# Altium PCB BMS Interface Board.PcbDoc
Units mm, origin at the board's own origin, x right, y up, seen from the top; angles counter-clockwise.
Board outline 76 x 88 mm, 2 copper layers (Top Layer, Bottom Layer); 45 components, 31 nets, 140 pads, 13 vias.
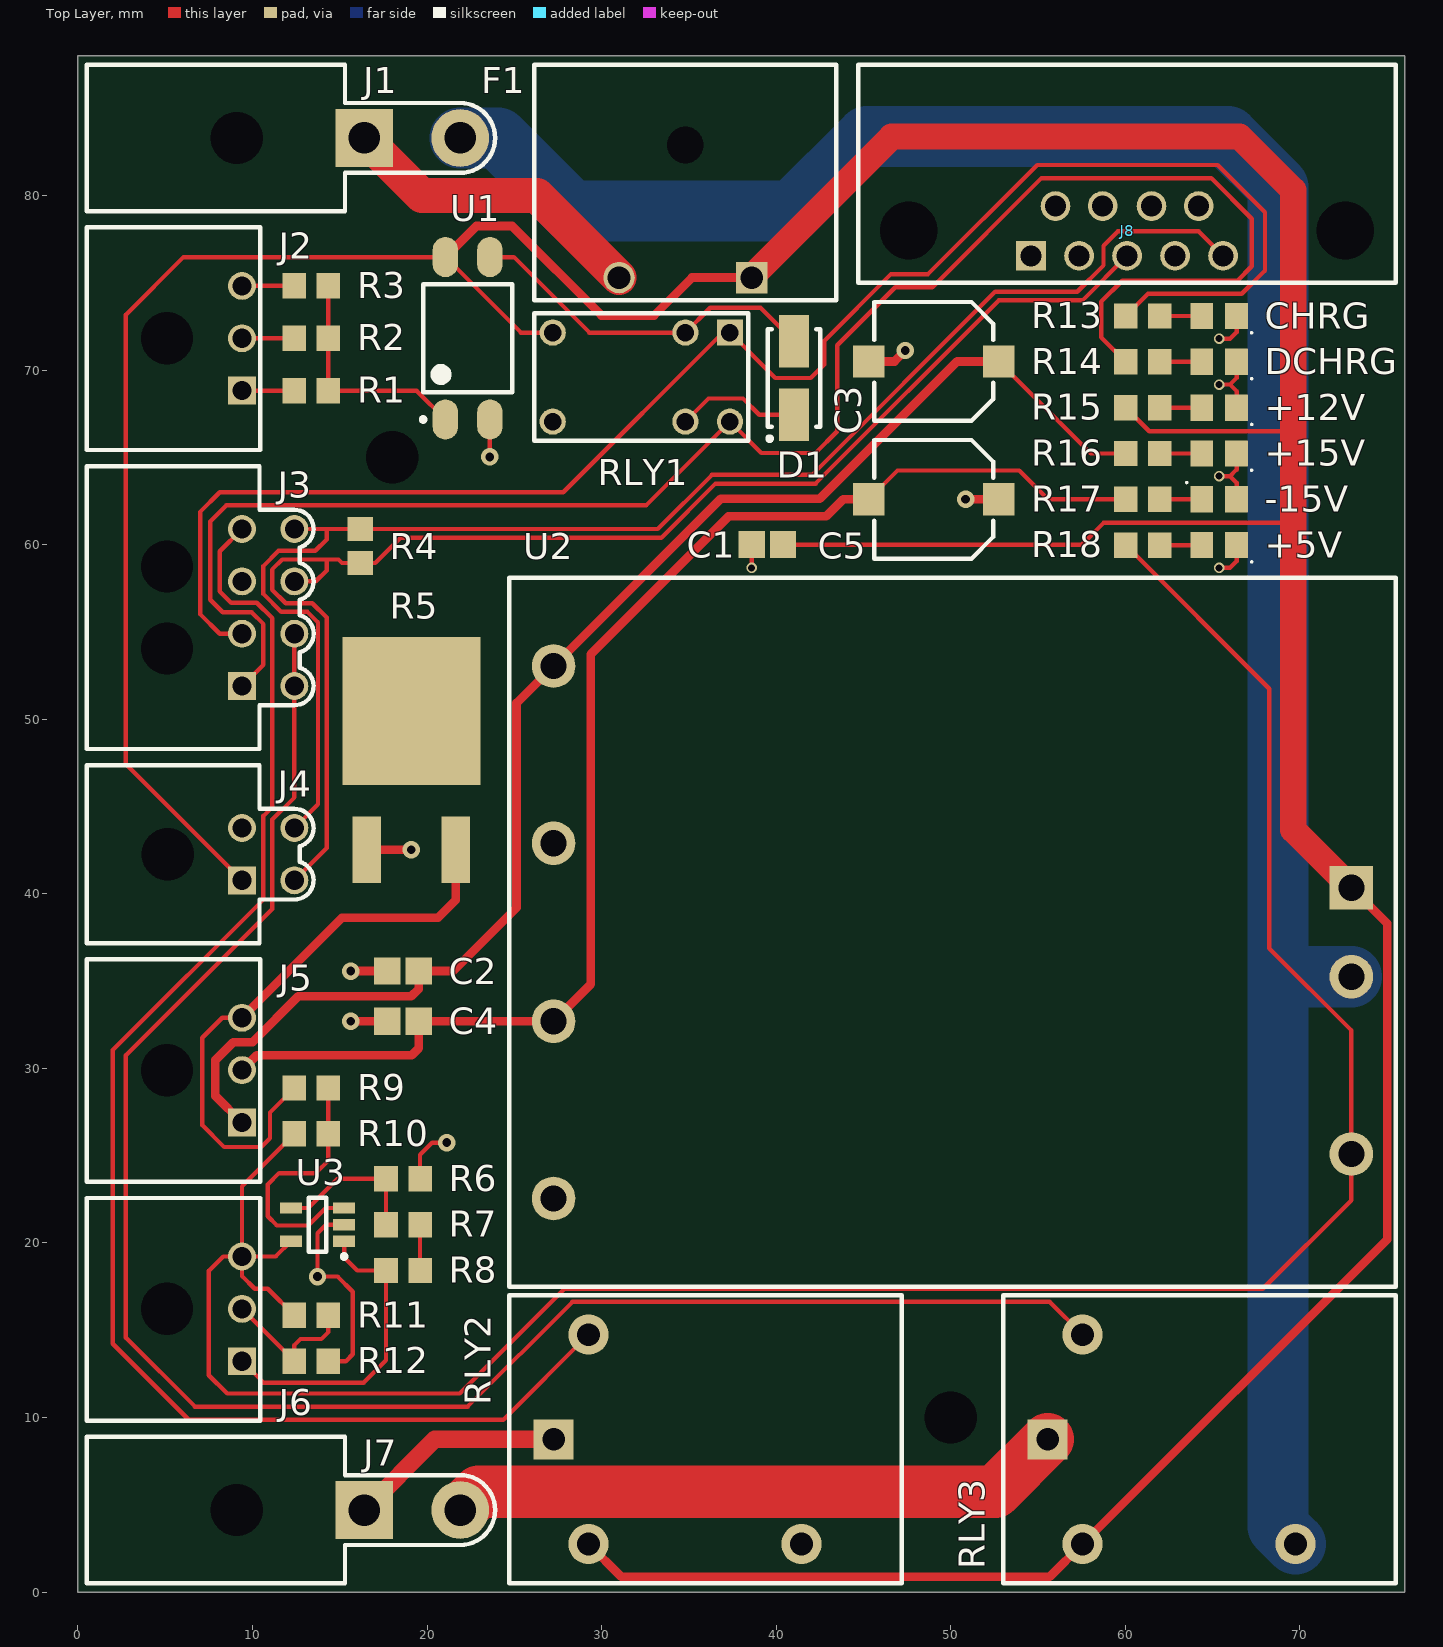
[diagram p0: Top Layer view]
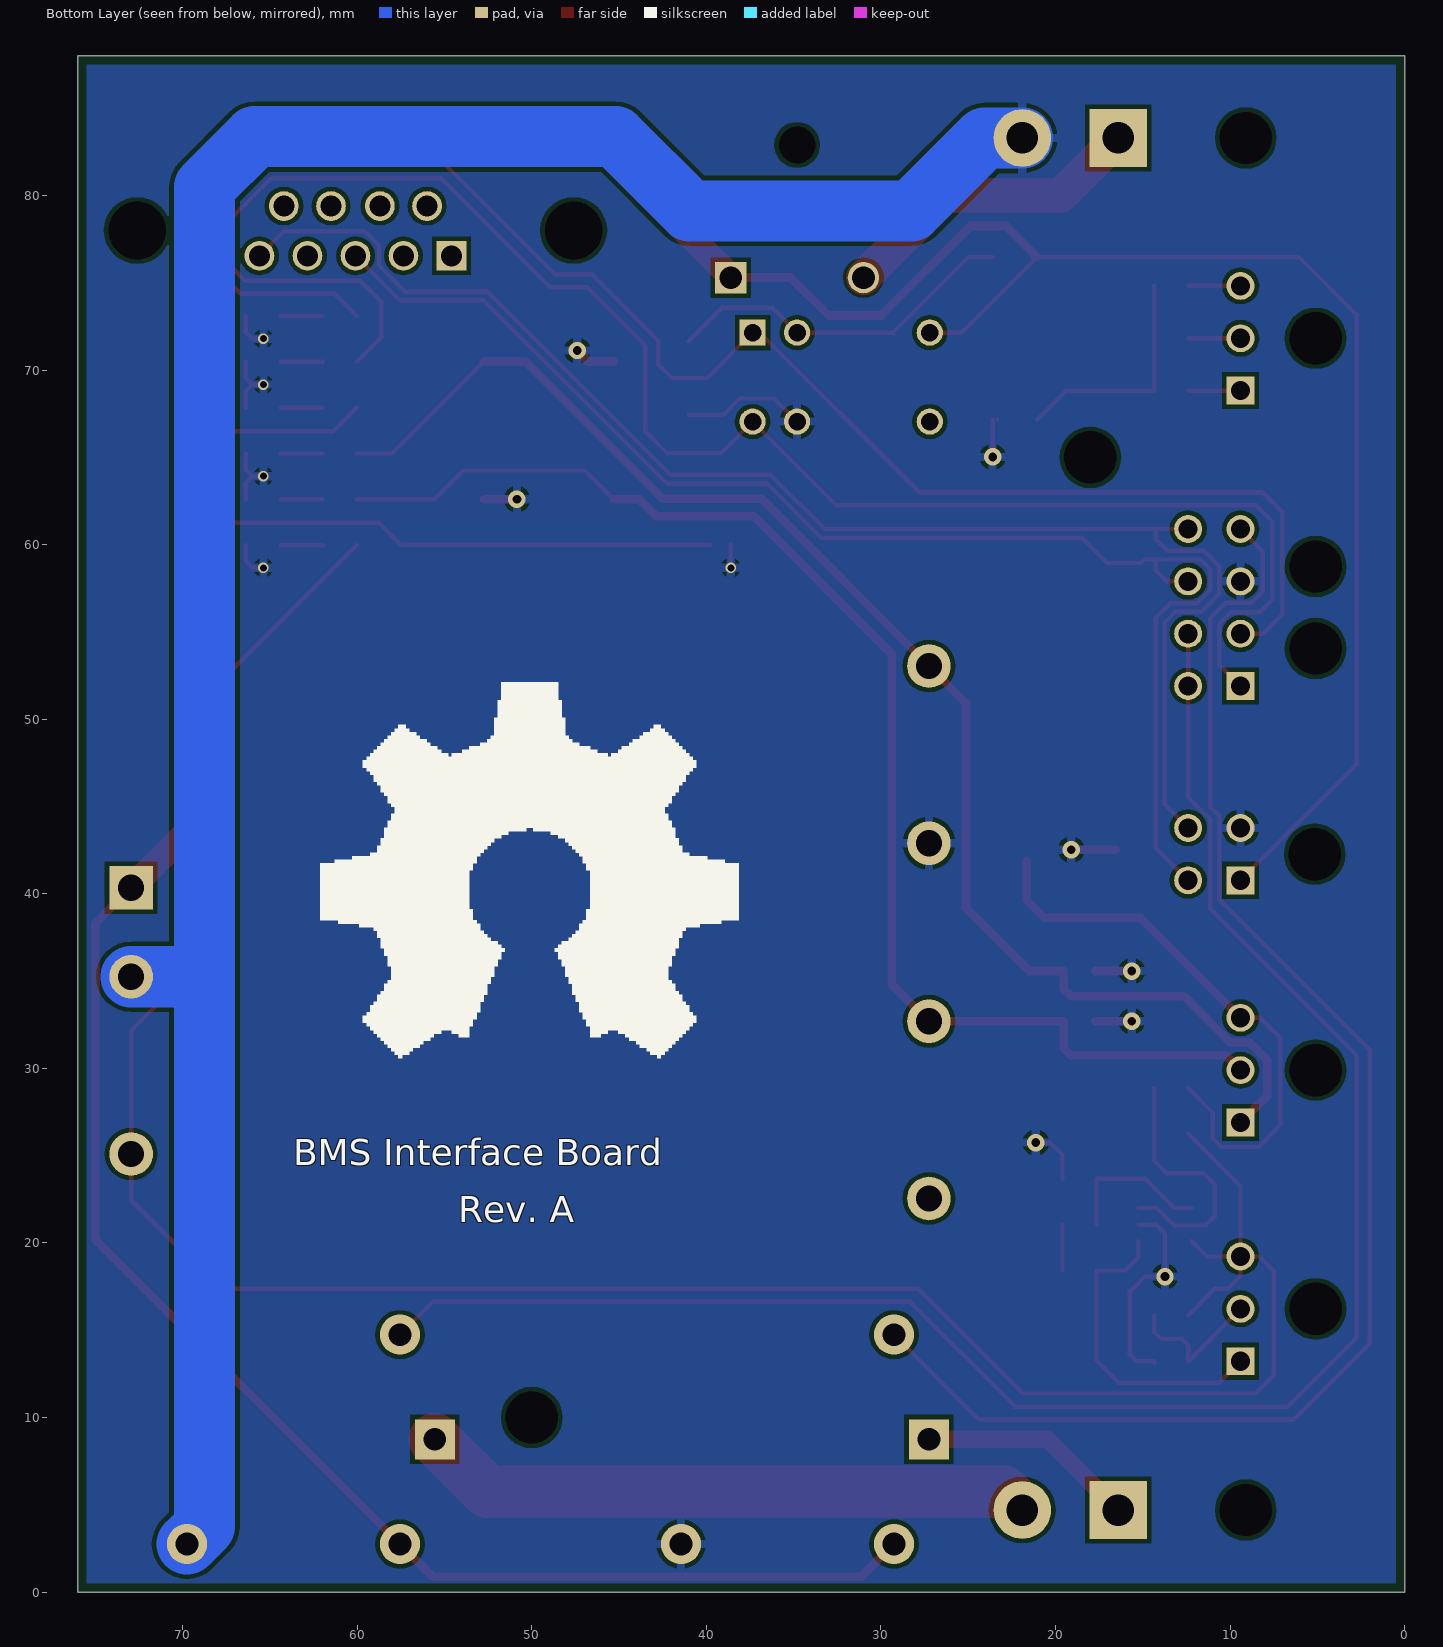
[diagram p1: Bottom Layer view, seen from below]

## Layer stack, top to bottom
Top Solder: solder mask 0.0102, Solder Resist, Dk 3.5
Top Layer: signal copper 0.0356
Dielectric1: dielectric 0.32, FR-4, Dk 4.8
Bottom Layer: signal copper 0.0356
Bottom Solder: solder mask 0.0102, Solder Resist, Dk 3.5

## Board outline
0,0 0,88 76,88 76,0

## Design rules (kind name [scope] priority, off if disabled: settings)
Clearance [All] p1: gap=0.25
ComponentClearance [All] p1: gap=0.25 collisioncheckmode=3 verticalgap=0.25 showdistances=FALSE
DiffPairsRouting [All] p1: maxlimit=0.254 minlimit=0.25 mostfreqgap=0.25 toplayer_minwidth=0.25 toplayer_maxwidth=0.4 toplayer_prefwidth=0.25 bottomlayer_minwidth=0.25 bottomlayer_maxwidth=0.4 bottomlayer_prefwidth=0.25 maxuncoupledlength=12.7
FabricationTestPointUsage TestPointUsage [All] p1: valid=0 allowmultiple=FALSE
FabricationTestpoint Testpoint [All] p1: side=3 testpointundercomponent=TRUE minsize=1.016 maxsize=2.54 preferedsize=1.524 minholesize=0 maxholesize=1.016 preferedholesize=0.813 testpointgrid=0.025 allowsidetop=TRUE allowsidebottom=TRUE usegrid=TRUE gridtolerance=0
HoleSize [All] p1: absolutevalues=TRUE maxlimit=5 minlimit=0.025 maxpercent=80.000 minpercent=20.000
PlaneClearance [All] p1: clearance=0.5
PlaneConnect [All] p1: planeconnectstyle=Relief reliefexpansion=0.5 reliefentries=4 reliefconductorwidth=0.25 reliefairgap=0.25
PolygonConnect [All] p1: connectstyle=Relief reliefconductorwidth=0.5 reliefentries=4 polygonreliefangle="90 Angle" airgapwidth=0.25
RoutingVias [All] p1: holewidth=1 width=1.5 viastyle="Through Hole" minholewidth=0.8 minwidth=1.3 maxholewidth=1.5 maxwidth=2
SilkToSolderMaskClearance SilkscreenOverComponentPads [IsPad] p1: minsilkscreentomaskgap=0.254 clearancetoexposedcopper=TRUE
SolderMaskExpansion [All] p1: expansion=0.102
UnpouredPolygon [All] p1: allowunpoured=FALSE
Width [All] p1: maxlimit=10 minlimit=0.2 preferedwidth=0.5
21 further rules are at their usual default settings.

## Classes and differential pairs
differential pair CAN1: +CAN1_P -CAN1_N

## Components (designator, comment, footprint, x,y, rotation, side; value= is the part's Value field where it differs from the comment)
+5V "LTST-C170GKT" "LITE-ON LTST-C170GKT (2012)" 65.375,59.975 r0 top (schematic designator D7)
+12V "LTST-C170GKT" "LITE-ON LTST-C170GKT (2012)" 65.375,67.85 r0 top (schematic designator D4)
+15V "LTST-C170GKT" "LITE-ON LTST-C170GKT (2012)" 65.375,65.225 r0 top (schematic designator D5)
-15V "LTST-C170GKT" "LITE-ON LTST-C170GKT (2012)" 65.375,62.6 r180 top (schematic designator D6)
C1 "Cap" "KEMET CERAMIC CAPACITOR (2012)" 39.5,60 r0 top
C2 "Cap" "KEMET CERAMIC CAPACITOR (2012)" 18.625,35.575 r0 top
C3 "Cap" "PANASONIC EEE-1EA101XAP" 49.025,70.5 r180 top locked
C4 "Cap" "KEMET CERAMIC CAPACITOR (2012)" 18.625,32.7 r0 top
C5 "Cap" "PANASONIC EEE-1EA101XAP" 49.025,62.6 r180 top locked (schematic designator C3)
CHRG "LTST-C170GKT" "LITE-ON LTST-C170GKT (2012)" 65.375,73.1 r0 top (schematic designator D2)
D1 "S1G" "FAIRCHILD S1G (DO-214AC)" 41.025,69.55 r90 top locked
DCHRG "LTST-C170GKT" "LITE-ON LTST-C170GKT (2012)" 65.375,70.475 r0 top (schematic designator D3)
F1 "4A" "LITTELFUSE 01530007Z" 34.8,79.1 r180 top locked
J1 "Molex Mega-Fit 172064-0002" "MOLEX MEGA-FIT 172064-0002" 9.1,83.3 r270 top locked
J2 "Molex Micro-Fit 43650-0300" "MOLEX MICRO-FIT 43650-0300" 7.25,71.825 r270 top locked
J3 "Molex Micro-Fit 43045-0800" "MOLEX MICRO-FIT 43045-0800" 5.1,56.4 r270 top locked
J4 "Molex Micro-Fit 43045-0400" "MOLEX MICRO-FIT 43045-0400" 5.1,42.275 r270 top locked
J5 "Molex Micro-Fit 43650-0300" "MOLEX MICRO-FIT 43650-0300" 7.25,29.9 r270 top locked
J6 "Molex Micro-Fit 43650-0300" "MOLEX MICRO-FIT 43650-0300" 7.25,16.225 r270 top locked
J7 "Molex Mega-Fit 172064-0002" "MOLEX MEGA-FIT 172064-0002" 9.1,4.7 r270 top locked
J8 "CAN1 DB9" "TE CONNECTIVITY 1734354-1" 60.1,78 r180 top locked
R1 "" "PHILIPS ERJ-SERIES RESISTOR (2012)" 13.375,68.825 r0 top
R2 "" "PHILIPS ERJ-SERIES RESISTOR (2012)" 13.375,71.825 r0 top
R3 "" "PHILIPS ERJ-SERIES RESISTOR (2012)" 13.375,74.825 r0 top
R4 "" "PHILIPS ERJ-SERIES RESISTOR (2012)" 16.175,59.925 r270 top
R5 "" "BOURNS PWR163S-25-2R50F (TO-252-3)" 19.1,44.425 r0 top
R6 "" "PHILIPS ERJ-SERIES RESISTOR (2012)" 18.625,23.675 r0 top locked
R7 "" "PHILIPS ERJ-SERIES RESISTOR (2012)" 18.625,21.05 r180 top locked
R8 "" "PHILIPS ERJ-SERIES RESISTOR (2012)" 18.625,18.425 r0 top locked
R9 "" "PHILIPS ERJ-SERIES RESISTOR (2012)" 13.375,28.875 r180 top locked
R10 "" "PHILIPS ERJ-SERIES RESISTOR (2012)" 13.375,26.25 r180 top locked
R11 "" "PHILIPS ERJ-SERIES RESISTOR (2012)" 13.375,15.85 r180 top locked
R12 "" "PHILIPS ERJ-SERIES RESISTOR (2012)" 13.375,13.225 r180 top locked
R13 "" "PHILIPS ERJ-SERIES RESISTOR (2012)" 61,73.1 r0 top
R14 "" "PHILIPS ERJ-SERIES RESISTOR (2012)" 61,70.475 r0 top
R15 "" "PHILIPS ERJ-SERIES RESISTOR (2012)" 61,67.85 r0 top
R16 "" "PHILIPS ERJ-SERIES RESISTOR (2012)" 61,65.225 r0 top
R17 "" "PHILIPS ERJ-SERIES RESISTOR (2012)" 61,62.6 r0 top
R18 "" "PHILIPS ERJ-SERIES RESISTOR (2012)" 61,59.975 r0 top
RLY1 "G5V-1 DC12" "OMRON G5V-1 DC12" 32.275,69.6 r180 top locked
RLY2 "G5LE-1A4 DC12" "OMRON G5LE-1A4 DC12" 35.95,8.75 r0 top
RLY3 "G5LE-1A4 DC12" "OMRON G5LE-1A4 DC12" 64.25,8.75 r0 top locked
U1 "LTV-817S" "LITE-ON LTV-817S (4-SOP)" 22.325,71.825 r90 top locked
U2 "PYB30-Q24-D15" "CUI PYB30-SERIES" 50.1,37.8 r180 top locked
U3 "MCP6071T-E/OT" "MICROCHIP MCP6071T-E/OT (SOT-23-5)" 13.725,21.05 r180 top locked

## Footprints (in the part's own frame and the unit in brackets; to place one, negate y for a bottom-side part, rotate by r counter-clockwise, add the part's x,y. Pads: shape width x height; smd on the part's side, far side on the other; paste and mask are expansions set on the pad)
"BOURNS PWR163S-25-2R50F (TO-252-3)" [mm] "25W 1% Thick Film Power Resistor"
  rect 1.65x3.8 smd: 1(-2.55,-1.9) 2(2.55,-1.9)
  rect 7.9x8.5 smd: ""(0,6.05)
"CUI PYB30-SERIES" [mm] "+/-15V 1A DC-DC Converter"
  rect 2.5x2.5 hole 1.5: 1(-22.85,-2.55)
  round 2.5 hole 1.5: 2(-22.85,2.55) 3(-22.85,12.7) 4(22.85,15.25) 5(22.85,5.1) 6(22.85,-5.1) 7(22.85,-15.25)
  silkscreen extent -25.4,-20.3 25.4,20.3, body extent -25.4,-20.3 25.4,20.3, height 11.8
"FAIRCHILD S1G (DO-214AC)" [mm] "400V 1A Rectifying Diode"
  rect 3x1.7 smd: 1(-2.1,0) 2(2.1,0)
  silkscreen extent -3.6,-1.5 2.8,1.52, body extent -2.8,-1.47 2.8,1.48, height 2.2
"KEMET CERAMIC CAPACITOR (2012)" [mm] "Ceramic Capacitor"
  rect 1.5x1.55 smd: 1(-0.9,0) 2(0.9,0)
  body extent -1.1,-0.72 1.1,0.72, height 1.4
"LITE-ON LTST-C170GKT (2012)" [mm] "Ultra-Bright Green LED"
  rect 1.3x1.5 smd: 1(-1,0) 2(1,0)
  silkscreen extent 1.81,-1.01 1.91,-0.91, body extent -1.05,-0.67 1.05,0.67, height 1.1
"LITE-ON LTV-817S (4-SOP)" [mm] "Photocoupler"
  oval 2.3x1.45 smd: 1(-4.65,1.275) 2(-4.65,-1.275) 3(4.65,-1.275) 4(4.65,1.275)
  silkscreen extent -4.77,-2.55 3.1,2.67, body extent -3.5,-2.55 3.5,2.55, height 4.6
"LITTELFUSE 01530007Z" [mm] "MINI Automotive PCB Fuseholder"
  rect 1.8x1.8 hole 1.3: 1(-3.8,3.8)
  round 1.8 hole 1.3: 2(3.8,3.8)
  round 0 hole 2.1: ""(0,-3.8)
  silkscreen extent -8.65,-8.4 8.65,5.1, body extent -8.6,-8.4 8.6,5.1, height 7.65
"MICROCHIP MCP6071T-E/OT (SOT-23-5)" [mm] "Low Offset Op-Amp"
  rect 1.25x0.65 smd: 1(-1.525,0.95) 2(-1.525,0) 3(-1.525,-0.95) 4(1.525,-0.95) 5(1.525,0.95)
  silkscreen extent -1.65,-1.55 0.5,1.95, body extent -0.9,-1.55 0.9,1.55, height 1.45
"MOLEX MEGA-FIT 172064-0002" [mm] "2-Pin Right-Angle Locking Male Header"
  rect 3.3x3.3 hole 1.8: 1(0,7.3)
  round 3.3 hole 1.8: 2(0,12.8)
  round 0 hole 3: ""(0,0)
  silkscreen extent -4.2,-8.6 4.2,14.8, body extent -4.2,-8.58 4.15,13.38, height 14.55
"MOLEX MICRO-FIT 43045-0400" [mm] "4-Pin Right-Angle Locking Male Header"
  rect 1.6x1.6 hole 1.1: 1(1.5,4.3)
  round 1.6 hole 1.1: 2(-1.5,4.3) 3(1.5,7.3) 4(-1.5,7.3)
  round 0 hole 3: ""(0,0.05)
  silkscreen extent -5.1,-4.6 5.1,8.4, body extent -5.07,-4.65 5.08,7.59, height 8.73
"MOLEX MICRO-FIT 43045-0800" [mm] "8-Pin Right-Angle Locking Male Header"
  rect 1.6x1.6 hole 1.1: 1(4.5,4.3)
  round 1.6 hole 1.1: 2(1.5,4.3) 3(-1.5,4.3) 4(-4.5,4.3) 5(4.5,7.3) 6(1.5,7.3) 7(-1.5,7.3) 8(-4.5,7.3)
  round 0 hole 3: ""(-2.35,0) ""(2.35,0)
  silkscreen extent -8.1,-4.6 8.1,8.41, body extent -8.08,-4.64 8.08,7.6, height 8.73
"MOLEX MICRO-FIT 43650-0300" [mm] "3-Pin Right-Angle Locking Male Header"
  rect 1.6x1.6 hole 1.1: 1(3,2.15)
  round 1.6 hole 1.1: 2(0,2.15) 3(-3,2.15)
  round 0 hole 3: ""(0,-2.15)
  silkscreen extent -6.35,-6.75 6.4,3.2, body extent -6.32,-6.75 6.33,3.15, height 5.54
"OMRON G5LE-1A4 DC12" [mm] "12VDC 10A SPST-NO Relay"
  rect 2.3x2.3 hole 1.3: 1(-8.7,0)
  round 2.3 hole 1.3: 2(-6.7,-6) 3(5.5,-6) 4(-6.7,6)
  silkscreen extent -11.25,-8.25 11.25,8.25, body extent -11.2,-8.2 11.2,8.2, height 19
"OMRON G5V-1 DC12" [mm] "12VDC 1A SPDT Relay"
  rect 1.5x1.5 hole 1: 1(-5.075,-2.55)
  round 1.5 hole 1: 2(-2.525,-2.55) 3(5.075,-2.55) 4(5.075,2.55) 5(-2.525,2.55) 6(-5.075,2.55)
  silkscreen extent -6.12,-3.65 6.12,3.65, body extent -6.1,-3.6 6.1,3.6, height 10
"PANASONIC EEE-1EA101XAP" [mm] "100uF 25V Aluminium Electrolytic Capacitor"
  rect 1.8x1.85 smd: 1(-3.725,0) 2(3.725,0)
  silkscreen extent -3.4,-3.4 3.4,3.4, body extent -3.4,-3.4 3.4,3.4, height 8
"PHILIPS ERJ-SERIES RESISTOR (2012)" [mm] "Thick Film Resistor"
  rect 1.35x1.45 smd: 1(-0.975,0) 2(0.975,0)
  body extent -1.1,-0.67 1.1,0.67, height 0.7
"TE CONNECTIVITY 1734354-1" [mm] "Female Right-Angle DB9 Connector"
  rect 1.7x1.7 hole 1.2: 1(5.5,1.45)
  round 1.7 hole 1.2: 2(2.75,1.45) 3(0,1.45) 4(-2.75,1.45) 5(-5.5,1.45) 6(4.1,-1.4) 7(1.4,-1.4) 8(-1.4,-1.4) 9(-4.1,-1.4)
  round 0 hole 3.3: ""(-12.5,0) ""(12.5,0)
  silkscreen extent -15.4,-9.5 15.4,3, body extent -15.4,-15.52 15.4,2.9, height 12.45

## Part data
+5V +12V +15V -15V CHRG DCHRG: library part LED0, "Typical INFRARED GaAs LED"
C1 C2 C4: "Capacitor"
C3 C5: library part "Cap Pol1", "Polarized Capacitor (Radial)"
D1: library part "Diode 1N4007", "1 Amp General Purpose Rectifier"
F1: library part "Fuse 1", "Fuse"
J1 J7: "2-Pin Right-Angle Locking Male Header"
J2 J5 J6: "3-Pin Right-Angle Locking Male Header"
J3: "8-Pin Right-Angle Locking Male Header"
J4: "4-Pin Right-Angle Locking Male Header"
J8: library part "D Connector 9", "Receptacle Assembly, 9 Position, Right Angle"
R1 R2 R3 R4 R5 R6 R7 R8 R9 R10 R11 R12 R13 R14 R15 R16 R17 R18: library part Res2, "Resistor"
RLY1: library part "Omron G5V-1 DC12", "12VDC 1A SPDT Relay"
RLY2 RLY3: library part "Omron G5LE-1A4 DC12", "12VDC 10A SPST-NO Relay"
U1: library part Optoisolator1, "4-Pin Phototransistor Optocoupler"
U2: library part "CUI PYB30-Q24-D15", "+/-15V 1A DC-DC Converter"
U3: library part "Microchip MCP6071T-E/OT", "Low Offset Op-Amp"

## Free pads (board coordinates)
  round 0 hole 3: ""(18,65) ""(50,10)

## Via types
v1: diameter 1, hole 0.5, Top Layer to Bottom Layer, 8 vias
v2: diameter 0.6, hole 0.4, Top Layer to Bottom Layer, 5 vias

## Nets (pads, with @x,y where several pads share a name; then routed paths per layer and width w, separated by ;. In a path a pad name is that pad's centre, name@x,y a point inside that pad or via, vN(x,y) a via of type N, cw(c..) or ccw(c..) an arc to the next point about the centre after c; other vN are vias at no path point)
+5V: J6.3 R10.2 R11.2 R18.1 U2.3 U3.5 | length 138.1
  Top Layer w0.25: U3.5 11.325,19.225 J6.3 ; R11.2 10.875,17.375 10.125,17.375 9.4,18.1 J6.3 ; R10.2 9.4,23.25 J6.3 ; R18.1 68.25,51.75 68.25,36.875 72.95,32.175 U2.3 72.95,22.45 67.875,17.375 27.875,17.375 21.875,11.375 8.55,11.375 7.5,12.425 7.5,18.4 8.325,19.225 J6.3
+12V: C1.2 F1.1 J4.1 R15.1 RLY1.3 RLY2.2 RLY3.2 U1.4 U2.1 | length 277.1
  Top Layer w0.25: J4.1 2.75,47.425 2.75,73.175 6.05,76.475 U1.4 25.375,72.15 RLY1.3 ; U1.4@21.175,76.475 U1.4@21.3,76.475 ; C1.2@39.775,60 57.5,60 58.75,61.25 69.625,61.25 ; R15.1 61.375,66.5 69.625,66.5
  Top Layer w0.5: U1.4 22.825,78.25 24.875,78.25 30,73.125 33,73.125 35.175,75.3 38.55,75.3 F1.1@38.575,75.325 ; RLY2.2 31.125,0.875 55.675,0.875 RLY3.2 75,20.2 75,38.3 U2.1
  Top Layer w1.5: F1.1@38.575,75.325 46.625,83.375 66.425,83.375 ; 66.55,83.375 69.625,80.3 69.625,66.5 69.625,43.675 U2.1
+15V: C2.2 C3.1 J5.1 R16.1 U2.7 | length 82.6
  Top Layer w0.25: C3.1 58.025,65.225 R16.1
  Top Layer w0.5: J5.1 7.875,28.425 7.875,30.475 8.9,31.5 10,31.5 12.625,34.125 19.1,34.125 19.525,34.55 C2.2 21.5,35.575 25.125,39.2 25.125,50.925 U2.7 36.825,62.625 42.5,62.625 50.375,70.5 C3.1
-15V: C4.2 C5.2 J5.2 R17.1 U2.5 | length 77.5
  Top Layer w0.25: C5.2 46.95,64.25 53.925,64.25 55.575,62.6 R17.1
  Top Layer w0.5: J5.2 10.25,30.75 19.125,30.75 19.525,31.15 C4.2 U2.5 29.375,34.825 29.375,53.725 37.275,61.625 42.875,61.625 43.85,62.6 C5.2
CAN1_N: J3.8 J4.4 J8.5 R4.1 | length 84.1
  Top Layer w0.25: J4.4 13.75,45.125 13.75,55.55 13.15,56.15 11.65,56.15 10.625,57.175 10.625,58.782 11.493,59.65 13.6,59.65 14.25,60.3 14.25,60.9 ; J3.8 14.25,60.9 ; J8.5 64.2,77.95 59.575,77.95 58.75,77.125 58.75,76 57.243,74.493 52.543,74.493 42.05,64 36.318,64 33.218,60.9 R4.1 14.25,60.9
CAN1_P: J3.7 J4.3 J8.3 R4.2 | length 80.1
  Top Layer w0.25: J4.3 14.25,42.625 14.25,55.828 13.428,56.65 11.9,56.65 11.125,57.425 11.125,58.575 11.7,59.15 14.25,59.15 ; J3.7 13.625,57.9 14.25,58.525 14.25,59.15 ; J8.3 57.543,73.993 52.75,73.993 42.257,63.5 36.525,63.5 33.425,60.4 18.482,60.4 17.032,58.95 R4.2 15.125,58.95 14.925,59.15 14.25,59.15
"CRNT. SENSOR CH1": J6.1 R8.1 U3.1 | length 18.1
  Top Layer w0.25: J6.1 10.625,12 16.375,12 17.65,13.275 R8.1 16,18.425 15.25,19.175 U3.1
"CRNT. SENSOR CH2": J6.2 R11.1 R12.2 | length 8.4
  Top Layer w0.25: J6.2 R12.2 12.4,14.15 12.75,14.5 13.95,14.5 14.35,14.9 R11.1
"CRNT. SENSOR IN": J5.3 R5.2 R9.2 | length 33.1
  Top Layer w0.25: J5.3 8.275,32.9 7.125,31.75 7.125,26.75 8.375,25.5 10.5,25.5 11,26 11,27.475 R9.2
  Top Layer w0.5: J5.3 15.125,38.625 20.625,38.625 21.65,39.65 R5.2@21.65,41.9
GND: +5V.2 +12V.2 +15V.2 -15V.1 C1.1 C2.1 C3.2 C4.1 C5.1 CHRG.2 D1.1 DCHRG.2 J1.2 J3.3 J4.2 R5.1 R6.2 R12.1 RLY1.5 RLY2.3 RLY3.3 U1.2 U2.2 U2.6 U3.2 | length 181.8
  Top Layer w0.25: R12.1@14.35,13.121 R12.1 15.35,13.225 15.75,13.625 15.75,17.2 14.875,18.075 v1(13.725,18.075) 13.725,20.55 14.225,21.05 U3.2 ; R6.2 19.6,25.05 20.3,25.75 v1(21.125,25.75) ; v1(23.6,65.025) U1.2 ; RLY1.5 36.125,68.375 38.1,68.375 39.025,67.45 D1.1 ; v2(38.6,58.675) C1.1 ; v2(65.375,58.675) 66,58.675 66.375,59.05 +5V.2 ; v2(65.375,63.925) 66,63.925 ; v2(65.375,69.175) 66,69.175 ; v2(65.375,71.8) 66,71.8 66.375,72.175 CHRG.2 ; -15V.1 66.375,63.55 66,63.925 ; +15V.2 66.375,64.3 66,63.925 ; +12V.2 66.375,68.8 66,69.175 ; DCHRG.2 66.375,69.55 66,69.175
  Top Layer w0.5: v1(15.625,32.7) C4.1 ; v1(15.625,35.575) C2.1 ; R5.1 v1(19.1,42.525) ; C3.2 46.775,70.5 v1(47.4,71.125) ; v1(50.85,62.6) C5.1
  Bottom Layer w3.5: J1.2 24.075,83.3 28.25,79.125 40.95,79.125 45.2,83.375 65.875,83.375 68.75,80.5 68.75,35.25 ; RLY3.3 68.75,3.75 68.75,35.25 ; U2.2 68.75,35.25
Net+5V_1: +5V.1 R18.2 | length 2.4
  Top Layer w0.25: R18.2 +5V.1
Net+12V_1: +12V.1 R15.2 | length 2.4
  Top Layer w0.25: R15.2 +12V.1
Net+15V_1: +15V.1 R16.2 | length 2.4
  Top Layer w0.25: R16.2 +15V.1
Net-15V_2: -15V.2 R17.2 | length 2.4
  Top Layer w0.25: R17.2 -15V.2
NetCHRG_1: CHRG.1 R13.2 | length 2.4
  Top Layer w0.25: R13.2 CHRG.1
NetD1_2: D1.2 RLY1.2 U1.3 | length 20.6
  Top Layer w0.25: U1.3 24.975,76.475 29.3,72.15 RLY1.2 36.225,73.575 39.1,73.575 D1.2
NetDCHRG_1: DCHRG.1 R14.2 | length 2.4
  Top Layer w0.25: R14.2 DCHRG.1
NetF1_2: F1.2 J1.1 | length 17.9
  Top Layer w2: J1.1 19.7,80 26.3,80 F1.2
NetJ2_1: J2.1 R1.1 | length 3
  Top Layer w0.25: J2.1 R1.1
NetJ2_2: J2.2 R2.1 | length 3
  Top Layer w0.25: J2.2 R2.1
NetJ2_3: J2.3 R3.1 | length 3
  Top Layer w0.25: J2.3 R3.1
NetJ3_1: J3.1 R14.1 RLY1.6 | length 101.5
  Top Layer w0.25: J3.1 10.625,53.125 10.625,55.45 9.95,56.125 8.3,56.125 7.575,56.85 7.575,61.325 8.5,62.25 32.55,62.25 RLY1.6 39.15,65.25 42.25,65.25 43.5,66.5 43.5,71.425 46.825,74.75 48.95,74.75 55.2,81 64.925,81 67.25,78.675 67.25,75.95 66.425,75.125 59.825,75.125 58.625,73.925 58.625,71.875 R14.1
NetJ3_2: J3.2 R13.1 RLY1.1 | length 94
  Top Layer w0.25: J3.2@9.337,54.9 8.125,54.9 7,56.025 7,61.875 8.125,63 27.8,63 RLY1.1@36.95,72.15 ; RLY1.1 39.95,69.55 41.975,69.55 42.75,70.325 42.75,71.675 46.575,75.5 48.7,75.5 54.95,81.75 65.3,81.75 68,79.05 68,75.7 66.675,74.375 61.3,74.375 R13.1
NetJ3_4: J3.4 RLY2.4 | length 84.4
  Top Layer w0.25: J3.4 8.125,59.625 8.125,57.325 8.775,56.675 10.25,56.675 11.129,55.796 11.129,44.967 10.625,44.463 10.625,39.675 2,31.05 2,14.225 6.35,9.875 24.375,9.875 RLY2.4
  Top Layer w0.5: J3.4@9.4,60.625 J3.4@9.4,60.85
NetJ3_5: J3.5 J3.6 RLY3.4 | length 104
  Top Layer w0.25: J3.6 J3.5 12.4,45.525 11.129,44.254 11.129,39.804 11.129,39.129 2.75,30.75 2.75,14.575 6.7,10.625 22.325,10.625 28.325,16.625 55.675,16.625 RLY3.4
NetJ7_1: J7.1 RLY2.1 | length 12.5
  Top Layer w1: J7.1 20.45,8.75 RLY2.1
NetJ7_2: J7.2 RLY3.1 | length 35.3
  Top Layer w3: J7.2 22.95,5.75 52.55,5.75 RLY3.1
NetR1_2: R1.2 R2.2 R3.2 U1.1 | length 13.4
  Top Layer w0.25: R3.2 R2.2 R1.2 19.4,68.825 U1.1
NetR6_1: R6.1 R7.2 U3.4 | length 8.8
  Top Layer w0.25: U3.4 13.2,22 14.875,23.675 R6.1 R7.2
NetR7_1: R7.1 R8.2 | length 2.6
  Top Layer w0.25: R8.2 R7.1
NetR9_1: R9.1 R10.1 U3.3 | length 15
  Top Layer w0.25: R9.1 R10.1 14.35,24.725 13.625,24 11.525,24 10.875,23.35 10.875,21.525 11.4,21 13.2,21 14.2,22 U3.3
pads on no net: F1. J1. J2. J3. J4. J5. J6. J7. J8. J8.1 J8.2 J8.4 J8.6 J8.7 J8.8 J8.9 R5. RLY1.4 U2.4

## Polygon pours and split planes (outlines as drawn)
GND on Bottom Layer "GND Plane" (solid, pour order 5): 0.5,0.5 75.5,0.5 75.5,87.5 0.5,87.5

## Silkscreen, mask and mechanical layers (free items; w line width, h text height)
Bottom Overlay:
  region: 453 vertices and 0 holes, not listed, extent 38.13,30.572 62.107,52.111
  text "BMS Interface Board" at 63.675,24.45 h1.5
  text "Rev. A" at 54.225,21.2 h1.5
Mechanical 1:
  the board outline again, w0.25